# Altium PCB modFOC_ESC.PcbDoc (part 2 of 2)
Units mm, origin at the board's own origin, x right, y up, seen from the top; angles counter-clockwise.
Board outline 82 x 45 mm, 4 copper layers (Top Layer, Mid Layer 1, Mid Layer 2, Bottom Layer), stack 1.531 mm thick; 112 components, 80 nets, 521 pads, 343 vias.
Unrouted connection lines stored in the file: 79.
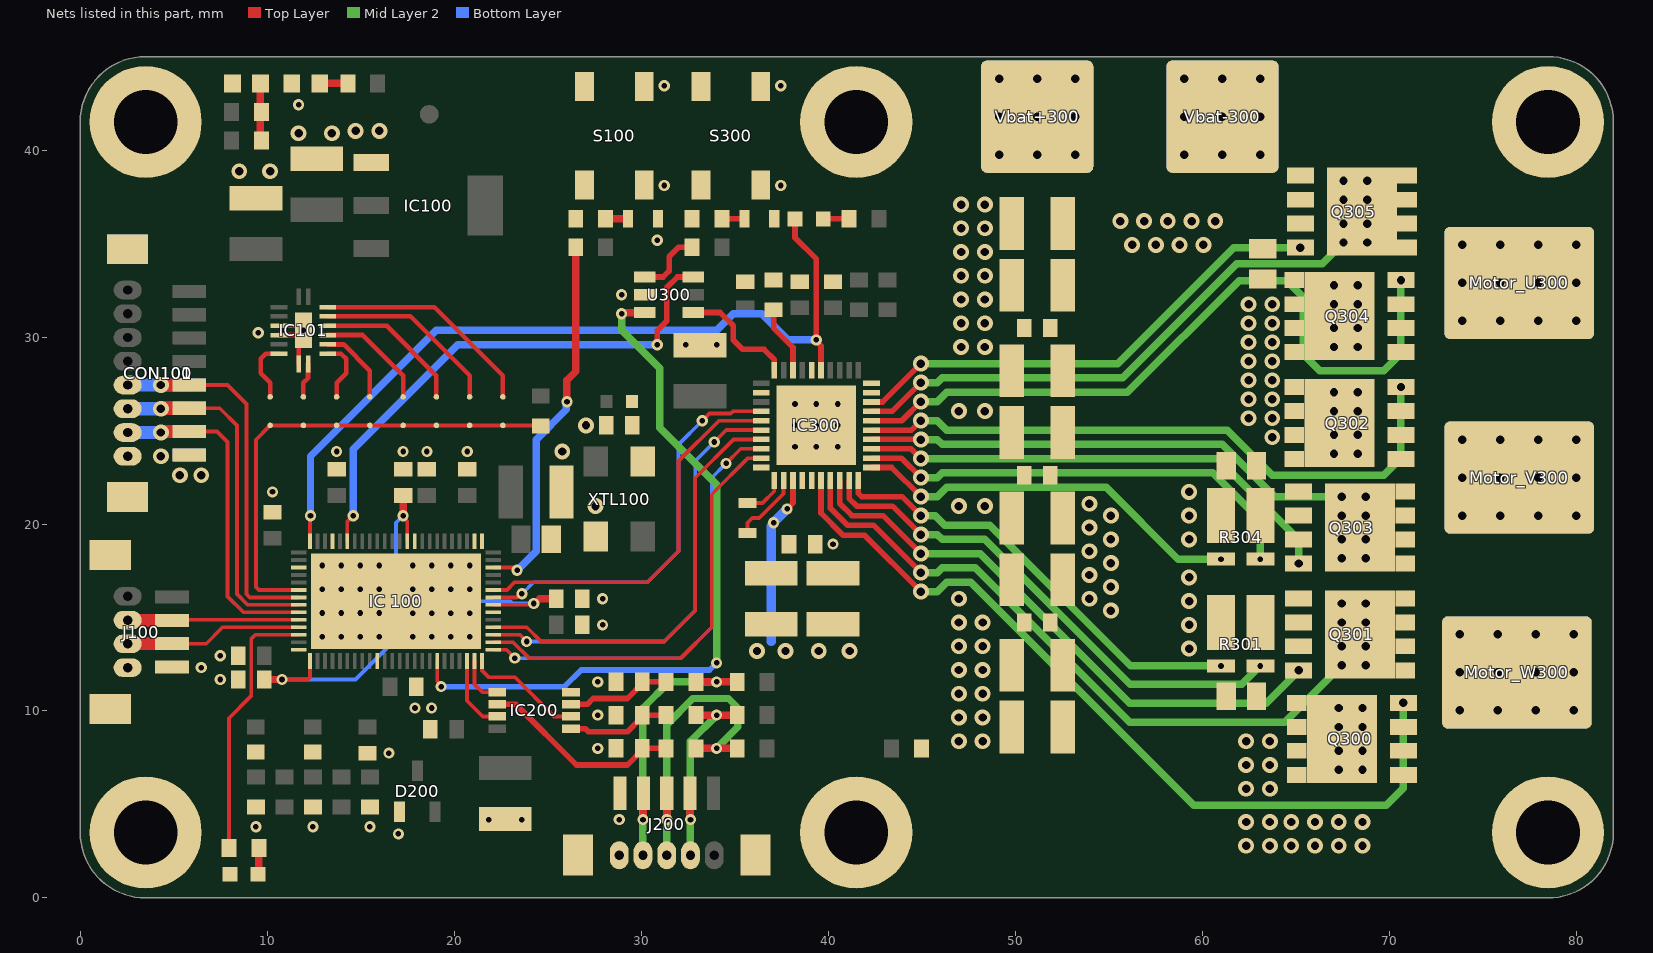
[diagram p4: the nets of this part, all layers, seen from the top]

## Via types
v1: diameter 0.85, hole 0.45, Top Layer to Bottom Layer, tented both sides, 202 vias
v2: diameter 0.6, hole 0.3, Top Layer to Bottom Layer, tented both sides, 99 vias
v3: diameter 0.6, hole 0.3, Top Layer to Bottom Layer, 42 vias

## Nets (pads, with @x,y where several pads share a name; then routed paths per layer and width w, separated by ;. In a path a pad name is that pad's centre, name@x,y a point inside that pad or via, vN(x,y) a via of type N, cw(c..) or ccw(c..) an arc to the next point about the centre after c; other vN are vias at no path point) (continued)
EN_A: R302.2 R303.1 S300.1 S300.2 U300.1 | length 3.6
  Top Layer w0.3: U300.1@30.196,33.208 31.176,33.208 31.496,33.528 31.496,34.29 32.004,34.798 R302.2@32.728,34.798
EN_C: "IC 100.71" U300.6 | length 28.5
  Top Layer w0.2: 14.291,19.075 14.291,20.13 14.605,20.444 v2(14.605,20.447)
  Top Layer w0.3: v2(30.861,29.591) 30.861,30.353 31.369,30.861 31.369,32.639 31.938,33.208 U300.6@32.796,33.208
  Bottom Layer w0.4: v2(14.605,20.447) 14.605,24.003 20.193,29.591 v2(30.861,29.591)
ENABLE: IC300.30 U300.4 | length 6.4
  Top Layer w0.3: U300.4@32.796,31.308 34.224,31.308 34.925,30.607 34.925,29.845 35.433,29.337 36.576,29.337 37.12,28.793 IC300.30@37.12,28.223
ENO: "IC 100.32" U300.3 | length 38.8
  Top Layer w0.2: 19.091,12.675 19.091,11.62 19.304,11.407 v2(19.304,11.303)
  Top Layer w0.4: v2(28.956,31.242) 29.01,31.242 29.076,31.308 U300.3@30.196,31.308
  Mid Layer 2 w0.4: v2(28.956,31.242) 28.956,30.353 30.988,28.321 30.988,25.146 34.036,22.098 v2(34.036,12.573)
  Bottom Layer w0.3: v2(19.304,11.303) 25.908,11.303 26.797,12.192 33.655,12.192 v2(34.036,12.573)
GHA: IC300.6 Q300.4 | length 44.7
  Top Layer w0.3: IC300.6@39.62,22.323 39.62,20.578 40.797,19.401 41.94,19.401 v1(44.958,16.383)
  Mid Layer 2 w0.4: v1(44.958,16.383) 45.847,16.383 46.355,16.891 47.625,16.891 59.563,4.953 69.85,4.953 70.762,5.865 v1(70.762,10.434)
GHB: IC300.15 Q302.4 | length 33.9
  Top Layer w0.3: IC300.15@42.32,25.023 44.446,25.023 44.45,25.019 v1(44.958,25.527)
  Mid Layer 2 w0.4: v1(44.958,25.527) 45.847,25.527 46.355,25.019 61.341,25.019 63.754,22.606 69.723,22.606 70.635,23.518 v1(70.635,27.325)
GHC: IC300.16 Q304.4 | length 39.5
  Top Layer w0.3: IC300.16@42.32,25.523 43.938,25.523 v1(44.958,26.543)
  Mid Layer 2 w0.4: v1(44.958,26.543) 45.847,26.543 46.355,27.051 56.007,27.051 61.976,33.02 64.516,33.02 65.405,32.131 65.405,29.083 66.294,28.194 69.723,28.194 70.635,29.106 v1(70.635,33.04)
GLA: IC300.8 Q301.4 | length 30.9
  Top Layer w0.3: IC300.8@40.62,22.323 40.62,21.102 41.275,20.447 42.926,20.447 v1(44.958,18.415)
  Mid Layer 2 w0.4: v1(44.958,18.415) 48.133,18.415 56.134,10.414 63.421,10.414 65.163,12.156 v1(65.163,12.172)
GLB: IC300.13 Q303.4 | length 26.1
  Top Layer w0.3: IC300.13@42.32,24.023 44.43,24.023 v1(44.958,23.495)
  Mid Layer 2 w0.4: v1(44.958,23.495) 60.833,23.495 65.163,19.165 v1(65.163,17.887)
GLC: IC300.18 Q305.4 | length 26.4
  Top Layer w0.3: IC300.18@42.32,26.523 42.906,26.523 v1(44.958,28.575)
  Mid Layer 2 w0.4: v1(44.958,28.575) 55.499,28.575 61.702,34.778 v1(65.255,34.778)
GND: "IC 100.3" "IC 100.14" "IC 100.24" "IC 100.44" "IC 100.53" "IC 100.54" "IC 100.62" "IC 100.73" "IC 100.77" C100.2 C101.2 C102.1 C103.1 C104.1 C105.1 C106.1 C107.1 C108.1 C109.1 C110.2 C111.1 C112.1 C113.1 C114.1 C115.1 C116.2 C200.1 C201.2 C202.2 C203.2 C204.1 C205.1 C206.1 C300.1 C301.1 C302.1 C303.1 C304.1 C305.1 C306.1 C307.1 C308.1 C311.1 C312.1 C313.1 C314.1 C315.1 C316.1 C317.2 C318.1 C319.2 C320.2 C321.1 C322.1 CON100.8 CON100.MP1 CON100.MP2 CON101.1 CON101.MP1 CON101.MP2 D200.1 IC100.1 IC101.4 IC101.5 IC101.8 IC101.17 IC200.4 IC300.19 IC300.20 IC300.26 IC300.32 IC300.40 IC300.41 J100.4 J100.MP1 J100.MP2 J200.1 J200.MP1 J200.MP2 LED_Amber200.1 LED_Blue200.1 LED_Green200.1 pad.2 pad.7@2.54,12.319 pad.7@2.54,23.622 pad.7@28.829,2.286 Q305.1 Q305.2 Q305.3 R214.1 R216.2 R217.2 R300.2 R301.1 R304.1 S100.3 S100.4 S300.3 S300.4 U300.2 Vbat-300.1 XTL100.2 | length 5.1
  Top Layer w0.2: v2(32.385,29.591) 32.422,29.554 C300.1@33.147,29.554
  Top Layer w0.25: IC101.5@10.638,30.103 IC101.17@11.688,30.103 ; IC101.4@10.638,30.603 11.688,30.603 v3(11.938,30.353) IC101.17@11.688,30.103 ; IC101.8@11.688,28.553 IC101.17@11.688,30.103
  other v1: 39.497,13.208 41.148,13.208 59.309,13.335 59.309,14.605 55.118,15.367 59.309,15.875 53.975,16.002 55.118,16.637 59.309,17.145 53.975,17.272 55.118,17.907 53.975,18.542 55.118,19.177 59.309,19.177 53.975,19.812 55.118,20.447 59.309,20.447 27.559,20.955 53.975,21.082 59.309,21.717 5.334,22.606 6.477,22.606 4.318,23.622 25.781,23.876 27.051,25.273 56.261,34.925 57.531,34.925 58.801,34.925 60.071,34.925 55.626,36.195 56.896,36.195 58.166,36.195 59.436,36.195 60.706,36.195 8.509,38.862 10.16,38.862 11.684,40.894 13.462,40.894 14.732,41.021 16.002,41.021
  other v2: 17.018,3.429 9.398,3.81 12.446,3.81 15.494,3.81 21.844,4.191 23.622,4.191 28.829,4.191 16.51,7.747 27.686,8.001 27.686,9.779 17.907,10.16 18.796,10.16 27.686,11.557 7.493,11.684 6.477,12.319 7.493,12.954 27.94,14.605 27.94,16.002 40.259,18.923 10.287,21.717 13.716,23.876 17.272,23.876 18.542,23.876 20.701,23.876 34.036,29.591 9.525,30.226 28.956,32.258 30.861,35.179 31.242,38.1 37.465,38.1 11.684,42.418 31.242,43.434 37.465,43.434
  other v3: 12.954,13.97 13.97,13.97 14.986,13.97 16.002,13.97 17.78,13.97 18.796,13.97 19.812,13.97 20.828,13.97 12.954,15.24 13.97,15.24 14.986,15.24 16.002,15.24 17.78,15.221 18.796,15.221 19.812,15.221 20.828,15.221 12.954,16.51 13.97,16.51 14.986,16.51 16.002,16.51 17.78,16.51 18.796,16.51 19.812,16.51 20.828,16.51 12.954,17.78 13.97,17.78 14.986,17.78 16.002,17.78 17.78,17.78 18.796,17.78 19.812,17.78 20.828,17.78 38.227,24.13 39.37,24.13 40.513,24.13 38.227,25.273 39.37,25.273 40.513,25.273 38.227,26.416 39.37,26.416 40.513,26.416
HALL_U: "IC 100.38" IC200.2 | length 6.3
  Top Layer w0.2: 21.491,12.675 21.491,12.164 21.844,11.811 23.241,11.811 25.344,9.708 IC200.2@26.232,9.708
HALL_U_5V: C201.1 IC200.3 R209.2 | length 5.6
  Top Layer w0.3: IC200.3@26.251,10.358 27.122,10.358 27.432,10.668 29.267,10.668 30.056,11.457 C201.1@30.056,11.557 R209.2@31.331,11.557
HALL_U_IN: J200.2 pad.6 R200.2 R209.1 | length 16
  Top Layer w0.4: v2(30.099,4.191) 30.109,4.201 30.109,5.584 J200.2@30.119,5.594 ; R209.1@32.931,11.557 v2(34.036,11.557) R200.2@35.141,11.557
  Mid Layer 2 w0.4: pad.6@30.099,2.286 v2(30.099,4.191) 30.099,10.16 31.496,11.557 v2(34.036,11.557)
HALL_V: "IC 100.37" IC200.5 | length 2.6
  Top Layer w0.2: 21.091,12.675 21.091,11.421 21.504,11.008 IC200.5@22.282,11.008
HALL_V_5V: C202.1 IC200.6 R208.2 | length 10.8
  Top Layer w0.3: IC200.6@22.301,10.358 23.297,10.358 26.543,7.112 29.267,7.112 30.056,7.901 C202.1@30.056,8.001 R208.2@31.331,8.001
HALL_V_IN: J200.3 pad.3 R201.2 R208.1 | length 17.8
  Top Layer w0.4: v2(31.369,4.191) J200.3@31.369,5.594 ; R208.1@32.931,8.001 v2(34.036,8.001) R201.2@35.141,8.001
  Mid Layer 2 w0.4: pad.3@31.369,2.286 v2(31.369,4.191) 31.369,9.271 32.766,10.668 34.671,10.668 35.179,10.16 35.179,9.144 v2(34.036,8.001)
HALL_W: "IC 100.36" IC200.7 | length 4.1
  Top Layer w0.2: 20.691,12.675 20.691,10.551 21.534,9.708 IC200.7@22.282,9.708
HALL_W_5V: C203.1 IC200.1 R207.2 | length 5.6
  Top Layer w0.3: IC200.1@26.251,9.058 27.01,9.058 27.178,8.89 29.267,8.89 30.056,9.679 C203.1@30.056,9.779 R207.2@31.331,9.779
HALL_W_IN: J200.4 pad.4 R202.2 R207.1 | length 11.7
  Top Layer w0.4: J200.4@32.619,5.594 32.629,5.584 32.629,4.201 v2(32.639,4.191) ; R207.1@32.931,9.779 v2(34.036,9.779) R202.2@35.141,9.779
  Mid Layer 2 w0.4: pad.4@32.639,2.286 v2(32.639,4.191) 32.639,8.382 v2(34.036,9.779)
NetC102_2: C102.2 R101.2 | length 1.2
  Top Layer w0.4: R101.2@28.105,36.322 C102.2@29.299,36.322
NetC114_2: C114.2 L100.2 XTL100.4
NetC309_1: C309.1 IC300.2 | length 3.8
  Top Layer w0.2: C309.1@35.687,19.52 35.687,20.066 35.941,20.32 36.322,20.32 37.62,21.618 IC300.2@37.62,22.323
NetC309_2: C309.2 IC300.1 | length 2.3
  Top Layer w0.2: C309.2@35.687,21.12 36.487,21.12 37.12,21.753 IC300.1@37.12,22.323
NetC322_2: C322.2 R303.2 | length 1.2
  Top Layer w0.3: R303.2@34.328,36.322 C322.2@35.522,36.322
NetIC101_7: IC101.7 SB100.2 | length 3.3
  Top Layer w0.25: SB100.2@10.16,26.797 10.16,27.559 9.652,28.067 9.652,28.829 9.926,29.103 IC101.7@10.638,29.103
NetIC101_9: IC101.9 SB101.2 | length 1.9
  Top Layer w0.25: SB101.2@11.938,26.797 11.938,27.559 12.188,27.809 IC101.9@12.188,28.553
NetIC101_10: IC101.10 SB102.2 | length 3.3
  Top Layer w0.25: IC101.10@13.238,29.103 13.95,29.103 14.224,28.829 14.224,28.067 13.716,27.559 SB102.2@13.716,26.797
NetIC101_11: IC101.11 SB103.2 | length 4.2
  Top Layer w0.25: IC101.11@13.238,29.603 14.085,29.603 15.494,28.194 SB103.2@15.494,26.797
NetIC101_12: IC101.12 SB104.2 | length 6.1
  Top Layer w0.25: IC101.12@13.238,30.103 15.109,30.103 17.272,27.94 SB104.2@17.272,26.797
NetIC101_13: IC101.13 SB105.2 | length 8.1
  Top Layer w0.25: IC101.13@13.238,30.603 16.387,30.603 19.05,27.94 SB105.2@19.05,26.797
NetIC101_14: IC101.14 SB106.2 | length 10
  Top Layer w0.24: IC101.14@13.238,31.103 17.665,31.103 20.828,27.94 SB106.2@20.828,26.797
NetIC101_15: IC101.15 SB107.2 | length 12
  Top Layer w0.24: IC101.15@13.238,31.603 18.943,31.603 22.606,27.94 SB107.2@22.606,26.797
NetIC300_28: IC300.28 R300.1 | length 3.7
  Top Layer w0.3: R300.1@37.084,31.458 37.084,30.48 38.12,29.444 IC300.28@38.12,28.223
NetLED300_2: LED300.2 R305.1 | length 1.4
  Top Layer w0.3: LED300.2@39.739,36.322 R305.1@41.11,36.322
NetLED_Amber200_2: LED_Amber200.2 R203.1 R204.1 | length 3.1
  Top Layer w0.25: R203.1@9.64,40.563 R203.1@9.69,40.513
  Top Layer w0.4: R203.1@9.64,40.563 9.64,42.037 LED_Amber200.2@9.64,43.561
NetLED_Blue200_2: LED_Blue200.2 R205.1 | length 1.5
  Top Layer w0.4: LED_Blue200.2@12.815,43.561 R205.1@14.313,43.561
NetLED_Green200_2: LED_Green200.2 R206.1 | length 1.4
  Top Layer w0.4: LED_Green200.2@9.513,1.397 9.563,1.447 R206.1@9.563,2.794
NetQ301_1: Q301.1 Q301.2 Q301.3 R301.4
NetQ303_1: Q303.1 Q303.2 Q303.3 R304.4
NFAULT: "IC 100.76" IC300.25 LED300.1 | length 44
  Top Layer w0.2: 12.291,19.075 12.291,20.419 v2(12.319,20.447)
  Top Layer w0.3: LED300.1@38.239,36.322 38.227,36.31 38.227,35.306 39.37,34.163 v2(39.37,29.845) 39.37,29.769 39.62,29.519 IC300.25@39.62,28.223
  Bottom Layer w0.4: v2(12.319,20.447) 12.319,23.622 19.05,30.353 34.036,30.353 34.925,31.242 36.449,31.242 37.846,29.845 v2(39.37,29.845)
NRST: "IC 100.50" R100.2 R101.1 S100.1 S100.2 | length 19.9
  Top Layer w0.2: 22.091,17.675 23.111,17.675 23.26,17.526 v2(23.368,17.526)
  Top Layer w0.4: v2(26.035,26.543) 26.035,27.686 26.505,28.156 R100.2@26.505,34.798
  Bottom Layer w0.4: v2(23.368,17.526) 24.384,18.542 24.384,24.511 25.997,26.124 25.997,26.505 v2(26.035,26.543)
PWM_U_H: "IC 100.39" IC300.38 | length 23.8
  Top Layer w0.2: 22.091,13.275 22.793,13.275 v2(23.241,12.827) ; v2(34.544,23.241) 35.326,24.023 IC300.38@36.42,24.023
  Bottom Layer w0.2: v2(23.241,12.827) 32.131,12.827 33.782,14.478 33.782,22.479 v2(34.544,23.241)
PWM_U_L: "IC 100.40" IC300.39 | length 23.3
  Top Layer w0.2: 22.091,13.675 23.155,13.675 24.003,12.827 32.131,12.827 33.782,14.478 33.782,21.59 35.715,23.523 IC300.39@36.42,23.523
PWM_V_H: "IC 100.41" IC300.36 | length 23.8
  Top Layer w0.2: 22.091,14.075 23.517,14.075 v2(23.876,13.716) ; v2(33.909,24.384) 34.548,25.023 IC300.36@36.42,25.023
  Bottom Layer w0.2: v2(23.876,13.716) 31.242,13.716 32.893,15.367 32.893,23.368 v2(33.909,24.384)
PWM_V_L: "IC 100.42" IC300.37 | length 23.3
  Top Layer w0.2: 22.091,14.475 23.879,14.475 24.638,13.716 31.242,13.716 32.893,15.367 32.893,22.479 34.937,24.523 IC300.37@36.42,24.523
PWM_W_H: "IC 100.46" IC300.34 | length 21.8
  Top Layer w0.2: 22.091,16.075 23.333,16.075 23.514,16.256 23.603,16.256 v2(23.622,16.275) ; v2(33.274,25.527) 33.655,25.908 34.798,25.908 34.913,26.023 IC300.34@36.42,26.023
  Bottom Layer w0.2: v2(23.622,16.275) 23.641,16.275 24.257,16.891 30.353,16.891 32.004,18.542 32.004,24.257 v2(33.274,25.527)
PWM_W_L: "IC 100.47" IC300.35 | length 20.9
  Top Layer w0.2: 22.091,16.475 22.825,16.475 23.241,16.891 30.353,16.891 32.004,18.542 32.004,23.368 34.159,25.523 IC300.35@36.42,25.523
SHA: IC300.7 Motor_W300.1 Q300.1 Q300.2 Q300.3 Q301.5 Q301.6 Q301.7 Q301.8 Q301.9 | length 36.1
  Top Layer w0.3: IC300.7@40.12,22.323 40.12,20.84 41.021,19.939 42.418,19.939 v1(44.958,17.399)
  Mid Layer 2 w0.4: v1(44.958,17.399) 45.847,17.399 46.101,17.653 47.879,17.653 56.134,9.398 64.424,9.398 v1(67.472,12.446) v1(67.472,13.462)
  other v1: 68.742,12.446 68.742,13.462 67.472,14.732 68.742,14.732 67.472,15.748 68.742,15.748
SHB: IC300.14 Motor_V300.1 Q302.1 Q302.2 Q302.3 Q303.5 Q303.6 Q303.7 Q303.8 Q303.9 | length 27.4
  Top Layer w0.3: IC300.14@42.32,24.523 v1@44.958,24.523
  Mid Layer 2 w0.4: v1(44.958,24.511) 45.847,24.511 46.101,24.257 61.087,24.257 63.881,21.463 v1(67.472,21.463) v1(67.472,20.447)
  other v1: 67.472,18.161 68.742,18.161 67.472,19.177 68.742,19.177 68.742,20.447 68.742,21.463
SHC: IC300.17 Motor_U300.1 Q304.1 Q304.2 Q304.3 Q305.5 Q305.6 Q305.7 Q305.8 Q305.9 | length 30
  Top Layer w0.3: IC300.17@42.32,26.023 43.422,26.023 v1(44.958,27.559)
  Mid Layer 2 w0.4: v1(44.958,27.559) 45.847,27.559 46.101,27.813 55.753,27.813 61.849,33.909 66.421,33.909 v1(67.564,35.052) v1(67.564,36.068)
  other v1: 68.834,35.052 68.834,36.068 67.564,37.338 68.834,37.338 67.564,38.354 68.834,38.354
SNA: IC300.10 R301.2 | length 23.9
  Top Layer w0.3: IC300.10@41.62,22.323 41.62,21.639 41.796,21.463 43.942,21.463 v1(44.958,20.447)
  Mid Layer 2 w0.4: v1(44.958,20.447) 45.72,20.447 46.228,19.939 48.641,19.939 56.173,12.407 v2(61.013,12.407)
SNB: IC300.11 R304.2 | length 21.1
  Top Layer w0.3: IC300.11@42.32,23.023 43.398,23.023 v1(44.958,21.463)
  Mid Layer 2 w0.4: v1(44.958,21.463) 45.847,21.463 46.355,21.971 54.864,21.971 58.713,18.122 v2(61.013,18.122)
SPA: IC300.9 R301.3 | length 27.5
  Top Layer w0.3: IC300.9@41.12,22.323 41.12,21.364 41.529,20.955 43.434,20.955 v1(44.958,19.431)
  Mid Layer 2 w0.4: v1(44.958,19.431) 45.847,19.431 46.101,19.177 48.387,19.177 56.144,11.42 62.132,11.42 v2(63.119,12.407)
SPB: IC300.12 R304.3 | length 24.5
  Top Layer w0.3: IC300.12@42.32,23.523 43.914,23.523 v1(44.958,22.479)
  Mid Layer 2 w0.4: v1(44.958,22.479) 45.847,22.479 46.101,22.733 60.579,22.733 63.119,20.193 v2(63.119,18.122)
SPI_MISO: "IC 100.9" CON100.7 CON101.2 pad.7@2.54,24.892 | length 19.3
  Top Layer w0.2: CON100.7@6.094,24.942 7.316,24.942 7.874,24.384 7.874,16.129 8.728,15.275 11.691,15.275
  Top Layer w0.7: v1(4.318,24.892) 4.359,24.892 4.409,24.942 CON100.7@5.84,24.942
  Bottom Layer w0.7: pad.7@2.54,24.892 v1(4.318,24.892) 4.359,24.892 4.409,24.942 CON101.2@5.84,24.942
SPI_MOSI: "IC 100.8" CON100.6 CON101.3 pad.7@2.54,26.162 | length 20.1
  Top Layer w0.2: CON100.6@6.094,26.192 7.463,26.192 8.382,25.273 8.382,16.256 8.963,15.675 11.691,15.675
  Top Layer w0.7: v1(4.318,26.162) 4.359,26.162 4.389,26.192 CON100.6@5.84,26.192
  Bottom Layer w0.7: pad.7@2.54,26.162 v1(4.318,26.162) 4.359,26.162 4.389,26.192 CON101.3@5.84,26.192
SPI_NSCS: "IC 100.6" R102.1 SB100.1 SB101.1 SB102.1 SB103.1 SB104.1 SB105.1 SB106.1 SB107.1 | length 25.8
  Top Layer w0.2: 11.691,16.475 9.56,16.475 9.398,16.637 9.398,24.511 10.096,25.209 SB100.1@10.16,25.273 SB101.1@11.938,25.273 SB102.1@13.716,25.273 SB103.1@15.494,25.273 SB104.1@17.272,25.273 SB105.1@19.05,25.273 SB106.1@20.828,25.273 SB107.1@22.606,25.273 24.6,25.273 R102.1@24.638,25.235
SPI_SCK: "IC 100.7" CON100.5 CON101.4 pad.7@2.54,27.432 | length 21.1
  Top Layer w0.2: CON100.5@6.104,27.432 7.874,27.432 8.89,26.416 8.89,16.256 9.071,16.075 11.691,16.075
  Top Layer w0.7: v1(4.318,27.432) 4.328,27.442 CON100.5@5.84,27.442
  Bottom Layer w0.7: pad.7@2.54,27.432 v1(4.318,27.432) 4.328,27.442 CON101.4@5.84,27.442
STATUS: "IC 100.12" R206.2 | length 14.3
  Top Layer w0.2: R206.2@7.963,2.667 7.963,9.614 9.144,10.795 9.144,13.843 9.249,13.948 9.249,13.958 9.366,14.075 11.691,14.075
UART_RX: "IC 100.10" J100.2 pad.7@2.54,14.859 | length 8.8
  Top Layer w0.2: J100.2@5.294,14.849 5.32,14.875 11.691,14.875
  Top Layer w0.4: pad.7@2.54,14.859 pad.7@2.55,14.849
  Top Layer w0.7: pad.7@2.55,14.849 J100.2@4.913,14.849
UART_TX: "IC 100.11" J100.3 pad.7@2.54,13.589 | length 9.1
  Top Layer w0.2: pad.7@2.54,13.589 pad.7@2.55,13.599 ; J100.3@5.294,13.599 6.741,13.599 7.617,14.475 11.691,14.475
  Top Layer w0.7: pad.7@2.55,13.599 J100.3@4.913,13.599
VB+: C301.2 C302.2 C303.2 C306.2 C307.2 C308.2 C310.1 C311.2 C312.2 C313.2 C314.2 C315.2 C316.2 C317.1 C319.1 C320.1 C321.2 IC300.4 IC300.5 Q300.5 Q300.6 Q300.7 Q300.8 Q300.9 Q302.5 Q302.6 Q302.7 Q302.8 Q302.9 Q304.5 Q304.6 Q304.7 Q304.8 Q304.9 R213.2 Vbat+300.1
  other v1: 62.357,2.794 63.627,2.794 64.77,2.794 66.04,2.794 67.31,2.794 68.58,2.794 62.357,4.064 63.627,4.064 64.77,4.064 66.04,4.064 67.31,4.064 68.58,4.064 62.357,5.842 63.627,5.842 67.31,6.858 68.58,6.858 62.357,7.112 63.627,7.112 67.31,7.874 68.58,7.874 46.99,8.382 48.26,8.382 62.357,8.382 63.627,8.382 67.31,9.144 68.58,9.144 46.99,9.652 48.26,9.652 67.31,10.16 68.58,10.16 46.99,10.922 48.26,10.922 46.99,12.192 48.26,12.192 46.99,13.462 48.26,13.462 46.99,14.732 48.26,14.732 46.99,16.002 46.99,20.955 48.387,20.955 67.056,23.749 68.326,23.749 63.754,24.638 67.056,24.765 68.326,24.765 62.484,25.654 63.754,25.654 46.99,26.035 48.387,26.035 67.056,26.035 68.326,26.035 62.484,26.67 63.754,26.67 67.056,27.051 68.326,27.051 62.484,27.686 63.754,27.686 62.484,28.702 63.754,28.702 47.117,29.464 48.387,29.464 67.056,29.464 68.326,29.464 62.484,29.718 63.754,29.718 67.056,30.48 68.326,30.48 47.117,30.734 48.387,30.734 62.484,30.734 63.754,30.734 62.484,31.75 63.754,31.75 67.056,31.75 68.326,31.75 47.117,32.004 48.387,32.004 67.056,32.766 68.326,32.766 47.117,33.274 48.387,33.274 47.117,34.544 48.387,34.544 47.117,35.814 48.387,35.814 47.117,37.084 48.387,37.084
VCC_CORE: "IC 100.15" "IC 100.45" "IC 100.63" C111.2 C112.2 C113.2 | length 30.2
  Top Layer w0.2: v2(10.795,11.684) 12.174,11.684 12.291,11.801 12.291,12.675 ; v2(17.272,20.447) 17.272,20.349 17.491,20.13 17.491,19.075 ; 22.091,15.675 24.184,15.675 v2(24.257,15.748)
  Top Layer w0.4: C113.2@9.844,11.684 v2(10.795,11.684) ; v2(17.272,20.447) C111.2@17.272,21.525 ; 24.565,16.002 C112.2@25.462,16.002
  Bottom Layer w0.2: v2(10.795,11.684) 14.732,11.684 16.891,13.843 16.891,15.875 ; v2(17.272,20.447) 16.891,20.066 16.891,15.875 ; v2(24.257,15.748) 23.114,15.748 22.987,15.875 16.891,15.875
VCP: C310.2 IC300.3 | length 9.1
  Top Layer w0.3: v2(37.806,20.807) 37.806,20.819 38.12,21.133 IC300.3@38.12,22.323
  Bottom Layer w0.5: 36.957,13.716 36.957,19.912 37.084,20.039 v2(37.084,20.066) 37.084,20.084 v2(37.806,20.807)
  other v1: 36.195,13.208 37.719,13.208
pads on no net: "IC 100.1" "IC 100.4" "IC 100.5" "IC 100.21" "IC 100.22" "IC 100.25" "IC 100.26" "IC 100.27" "IC 100.28" "IC 100.29" "IC 100.30" "IC 100.31" "IC 100.33" "IC 100.34" "IC 100.35" "IC 100.48" "IC 100.49" "IC 100.56" "IC 100.57" "IC 100.58" "IC 100.59" "IC 100.60" "IC 100.64" "IC 100.65" "IC 100.66" "IC 100.67" "IC 100.68" "IC 100.69" "IC 100.74" "IC 100.75" IC300.21 XTL100.1

## Polygon pours and split planes (outlines as drawn)
DVDD on Mid Layer 2 "DVDD_L03_P010" (solid, pour order 10): 44.196,12.446 44.196,45 31.369,45 31.369,25.273 34.544,22.098 34.544,12.446
3V3 on Mid Layer 2 "3V3_L03_P004" (solid, remove dead copper, pour order 4): 27.94,4.191 27.419,3.67 27.419,0 0.254,0 0.254,45 31.115,45.076 31.115,25.908 31.115,12.446 28.702,12.446 27.94,11.684
VB+ on Top Layer (solid, pour order 106): 61.595,0 62.403,0 69.347,0 69.347,10.859 64.537,10.859 63.866,11.53 62.403,11.53 62.403,10.06 62.403,9.698 61.595,8.89 61.595,6.985 50.471,6.985 50.471,13.856 50.857,14.242 50.871,14.242 50.871,15.222 50.485,15.608 50.471,15.608 50.471,21.73 50.857,22.116 50.871,22.116 50.871,23.096 50.485,23.482 50.471,23.482 50.471,29.604 50.857,29.99 50.871,29.99 50.871,30.97 50.485,31.356 50.471,31.356 50.471,38.406 50.848,38.783 54.181,38.783 54.181,44.958 46.101,44.958 46.101,16.256 45.339,15.494 44.577,15.494 42.059,18.012 38.849,18.012 38.849,16.712 41.669,16.712 46.101,12.28 46.101,9.981 44.831,8.711 44.831,7.291 46.101,6.021 46.101,0 50.471,0
VB+ on Top Layer "VB+_L01_P076" (solid, pour order 76): 39.27,21.873 39.243,21.846 39.243,20.358 38.298,19.413 38.298,18.433 38.719,18.012 41.669,18.012 41.669,16.712 35.547,16.712 35.547,18.012 37.097,18.012 37.518,18.433 37.518,19.413 38.47,20.365 38.47,22.773 39.27,22.773
NetQ301_1 on Top Layer "NETQ301_1_L01_P095" (solid, pour order 95): 65.888,16.447 64.107,16.447 63.867,16.207 62.371,16.207 62.371,13.257 64.218,13.257 64.438,13.037 65.888,13.037
NetQ303_1 on Top Layer "NETQ303_1_L01_P094" (solid, pour order 94): 65.888,22.162 64.107,22.162 63.867,21.922 62.371,21.922 62.371,18.972 64.218,18.972 64.438,18.752 65.888,18.752
VB+ on Top Layer "VB+_L01_P092" (solid, pour order 92): 62.511,33.609 61.595,32.693 61.595,28.765 61.595,24.892 62.403,24.084 62.403,22.379 63.423,22.379 64.094,23.05 69.22,23.05 69.22,27.877 69.22,33.465 64.41,33.465 64.266,33.609
SHA on Top Layer "SHA_L01_P091" (solid, pour order 91): 70.037,0 82,0 82,16.447 66.578,16.447 66.578,11.747 71.388,11.747 71.755,11.38 71.755,9.837 71.487,9.569 70.037,9.569
SHB on Top Layer "SHB_L01_P090" (solid, pour order 90): 71.755,27.75 76.517,27.75 82,27.75 82,17.462 66.578,17.462 66.578,22.162 69.91,22.162 69.91,26.46 71.487,26.46 71.755,26.728
SHC on Top Layer "SHC_L01_P089" (solid, pour order 89): 66.67,45 82,45 82,28.765 69.91,28.765 69.91,32.175 71.36,32.175 71.628,32.443 71.628,34.205 71.48,34.353 66.67,34.353
GND on Top Layer "GND_L01_P088" (solid, pour order 88): 61.803,10.06 60.96,9.217 60.96,7.493 51.891,7.493 51.891,13.856 51.491,14.256 51.491,15.222 51.505,15.222 51.891,15.608 51.891,21.73 51.491,22.13 51.491,23.096 51.505,23.096 51.891,23.482 51.891,29.604 51.491,30.004 51.491,30.97 51.505,30.97 51.891,31.356 51.891,38.1 54.483,38.1 54.991,38.608 54.992,44.783 65.98,44.783 65.98,35.643 64.53,35.643 63.981,35.094 63.981,34.209 62.276,34.209 60.96,32.893 60.96,24.638 61.803,23.795 61.803,22.379 61.76,22.336 61.761,18.972 60.265,18.972 59.944,18.65 59.944,18.088 59.944,17.526 60.198,17.272 61.76,17.272 61.761,13.257 60.265,13.257 59.944,12.935 59.944,12.445 59.944,11.811 60.225,11.53 61.803,11.53
VCP on Top Layer "VCP_L01_P069" (solid, pour order 69): 35.547,15.292 35.547,12.446 38.367,12.446 38.367,15.292
EN_A on Top Layer "EN_A_L01_P077" (solid, pour order 77): 32.698,44.167 32.698,37.167 32.328,36.797 32.328,34.323 33.128,34.323 33.128,36.797 33.698,37.367 33.698,44.167
DVDD on Top Layer "DVDD_L01_P075" (solid, pour order 75): 34.882,26.373 34.693,26.184 34.557,26.184 31.737,26.184 31.737,27.484 34.557,27.484 35.368,26.673 35.97,26.673 36.87,26.673 36.87,26.373
3V3 on Top Layer "3V3_L01_P074" (solid, pour order 74): 22.374,23.127 22.374,24.384 23.674,24.384 23.674,20.322 24.084,19.912 24.084,18.442 24.017,18.375 21.666,18.375 21.666,18.575 22.766,18.575 22.86,18.669 22.86,19.821 22.374,20.307
NetC114_2 on Top Layer "NETC114_2_L01_P070" (solid, pour order 70): 29.829,26.893 29.829,25.883 29.919,25.793 29.919,24.783 30.566,24.136 30.729,24.136 30.729,22.536 29.429,22.536 29.429,24.493 29.139,24.783 29.139,25.763 29.179,25.803 29.179,26.893
"CLK 25" on Top Layer "CLK_25_L01_P073" (solid, pour order 73): 21.666,18.175 29.068,18.175 29.429,18.536 29.429,20.136 30.729,20.136 30.729,18.536 30.168,17.975 21.666,17.975
NRST on Top Layer "NRST_L01_P006" (solid, pour order 6): 26.475,44.167 26.475,37.167 26.105,36.797 26.105,34.323 26.905,34.323 26.905,36.797 27.475,37.367 27.475,44.167
+5 on Top Layer "+5_L01_P007" (solid, pour order 7): 3.683,31.877 3.548,32.012 2.29,32.012 2.29,33.012 3.548,33.012 4.826,34.29 6.92,34.29 7.988,35.358 7.988,35.378 10.808,35.378 11.008,35.178 16.513,35.178 16.513,34.278 11.008,34.278 10.808,34.078 9.567,34.078 7.366,31.877
3V3 on Top Layer "3V3_L01_P080" (solid, pour order 80): 11.176,35.306 11.176,38.771 16.609,38.771 16.615,45 25.781,45 25.781,32.004 18.923,32.004 16.615,34.312 16.615,35.306
GND on Top Layer "GND_L01_P087" (solid, pour order 87): 41.87,27.673 41.87,26.873 42.77,26.873 42.77,27.673
GND on Top Layer "GND_L01_P081" (solid, remove dead copper, pour order 81): 0.167,0 0.167,44.974 44.196,44.974 44.196,0
GND on Bottom Layer "GND_L04_P108" (solid, pour order 108): 59.944,11.747 59.944,12.341 59.944,12.935 60.265,13.257 64.218,13.257 64.438,13.037 65.888,13.037 65.888,17.018 64.389,17.018 64.135,17.272 60.203,17.272 59.944,17.531 59.944,18.65 60.265,18.972 64.218,18.972 64.438,18.752 65.888,18.752 65.888,22.162 54.547,22.162 53.34,20.955 53.34,13.208 54.801,11.747
VB+ on Bottom Layer "VB+_L04_P096" (solid, pour order 96): 69.22,23.05 54.165,23.05 52.541,21.426 52.541,12.991 54.673,10.859 69.347,10.859 69.347,0 46.101,0 46.101,44.958 54.356,44.958 54.356,34.89 55.781,33.465 69.22,33.465 69.22,27.877
GND on Bottom Layer "GND_L04_P107" (solid, pour order 107): 65.98,44.783 54.992,44.783 54.991,35.306 56.088,34.209 62.276,34.209 63.981,34.209 63.981,35.094 64.53,35.643 65.98,35.643
VCP on Bottom Layer "VCP_L04_P105" (solid, pour order 105): 35.547,12.446 35.547,15.292 38.367,15.292 38.367,12.446
SHA on Bottom Layer "SHA_L04_P103" (solid, pour order 103): 70.037,0 82,0 82,16.447 66.578,16.447 66.578,11.747 71.388,11.747 71.755,11.38 71.755,9.837 71.487,9.569 70.037,9.569
SHB on Bottom Layer "SHB_L04_P102" (solid, pour order 102): 71.755,27.75 76.517,27.75 82,27.75 82,17.462 66.578,17.462 66.578,22.162 69.91,22.162 69.91,26.46 71.487,26.46 71.755,26.728
SHC on Bottom Layer "SHC_L04_P101" (solid, pour order 101): 66.67,45 82,45 82,28.765 69.91,28.765 69.91,32.175 71.36,32.175 71.628,32.443 71.628,34.205 71.48,34.353 66.67,34.353
+5 on Bottom Layer "+5_L04_P079" (solid, pour order 79): 3.683,31.877 3.548,32.012 2.29,32.012 2.29,33.012 3.548,33.012 4.826,34.29 7.112,34.29 7.112,31.877
GND on Bottom Layer "GND_L04_P078" (solid, pour order 78): 7.112,34.29 7.112,36.703 0,36.703 0,19.431 7.112,19.431 7.112,31.877 3.683,31.877 3.683,33.147 4.826,34.29
3V3 on Bottom Layer "3V3_L04_P008" (solid, pour order 8): 16.637,45 16.637,40.259 11.049,40.259 11.049,34.29 16.637,34.29 18.923,32.004 25.781,32.004 25.781,45
GND on Mid Layer 1 "GND_L02_P000" (solid, pour order 0): 82,0 82,45 25.781,45 0,45 0,0
no net on Bottom Solder "NONET_L04_P110" (solid): 66.005,44.766 55.017,44.766 55.016,35.29 56.113,34.192 62.301,34.192 64.006,34.192 64.006,35.077 64.555,35.626 66.005,35.626
no net on Bottom Solder "NONET_L04_P109" (solid): 59.919,11.764 59.919,12.358 59.919,12.952 60.24,13.274 64.193,13.274 64.413,13.054 65.863,13.054 65.863,17.035 64.364,17.035 64.11,17.289 60.178,17.289 59.919,17.548 59.919,18.667 60.24,18.989 64.193,18.989 64.413,18.769 65.863,18.769 65.863,22.179 54.522,22.179 53.315,20.972 53.315,13.225 54.776,11.764
no net on Bottom Solder (solid): 54.673,10.859 52.578,12.954 52.578,21.463 54.165,23.05 69.22,23.05 69.22,33.465 55.781,33.465 54.356,34.89 54.356,44.796 46.101,44.796 46.101,2.032 69.342,2.032 69.347,10.859
no net on Top Solder (solid): 59.563,39.083 62.484,39.083 62.484,38.1 58.674,34.29 58.674,9.271 55.753,9.271 55.753,34.29 59.563,38.1

## Silkscreen, mask and mechanical layers (free items; w line width, h text height)
Top Overlay:
  text "3V3" at 19.584,42.317 h0.8
  text "GND" at 66.602,40.205 h1.2 r90
  text "VB+" at 47.044,39.951 h1.2 r90
  text "Fault" at 37.364,34.316 h0.8
  text "5V" at 8.636,32.639 h0.8
  text "SPI sel. / 0 - 8" at 14.478,28.448 h1.2
  text "U" at 79.81,28.394 h1.2 r90
  text "DVDD" at 28.601,27.839 h0.8
  text "V" at 79.81,18.107 h1.2 r90
  text "Vcore" at 28.601,15.647 h0.8
  text "Vcp" at 32.919,14.263 h0.8
  text "W" at 79.683,7.693 h1.2 r90
  text "TMCst" at 10.313,0.788 h0.8
Bottom Overlay:
  text "5V" at 9.487,43.239 h0.8
  text "3V" at 12.662,43.239 h0.8
  text "TMCrs" at 30.454,43.079 h0.8
  text "DRVrs" at 36.83,43.053 h0.8
  text "5V / nCSbin0 /  / nCSbin1 / nCSbin2 / SCK / MOSI / MISO / GND" at 12.573,21.971 h0.8
  text "3V3 / RX / TX / GND" at 7.493,11.684 h0.8
  text "GND / H_U / H_V / H_W / 5V" at 34.925,7.112 h0.8 r90
Board Shape:
  the board outline again, w0.254